# Altium PCB NEW_PCB_2021-05-29.pcbdoc
Units mm, origin at the board's own origin, x right, y up, seen from the top; angles counter-clockwise.
Board outline 221.55 x 181.63 mm, 2 copper layers (Top Layer, Bottom Layer); 16 components, 10 nets, 32 pads, 0 vias.
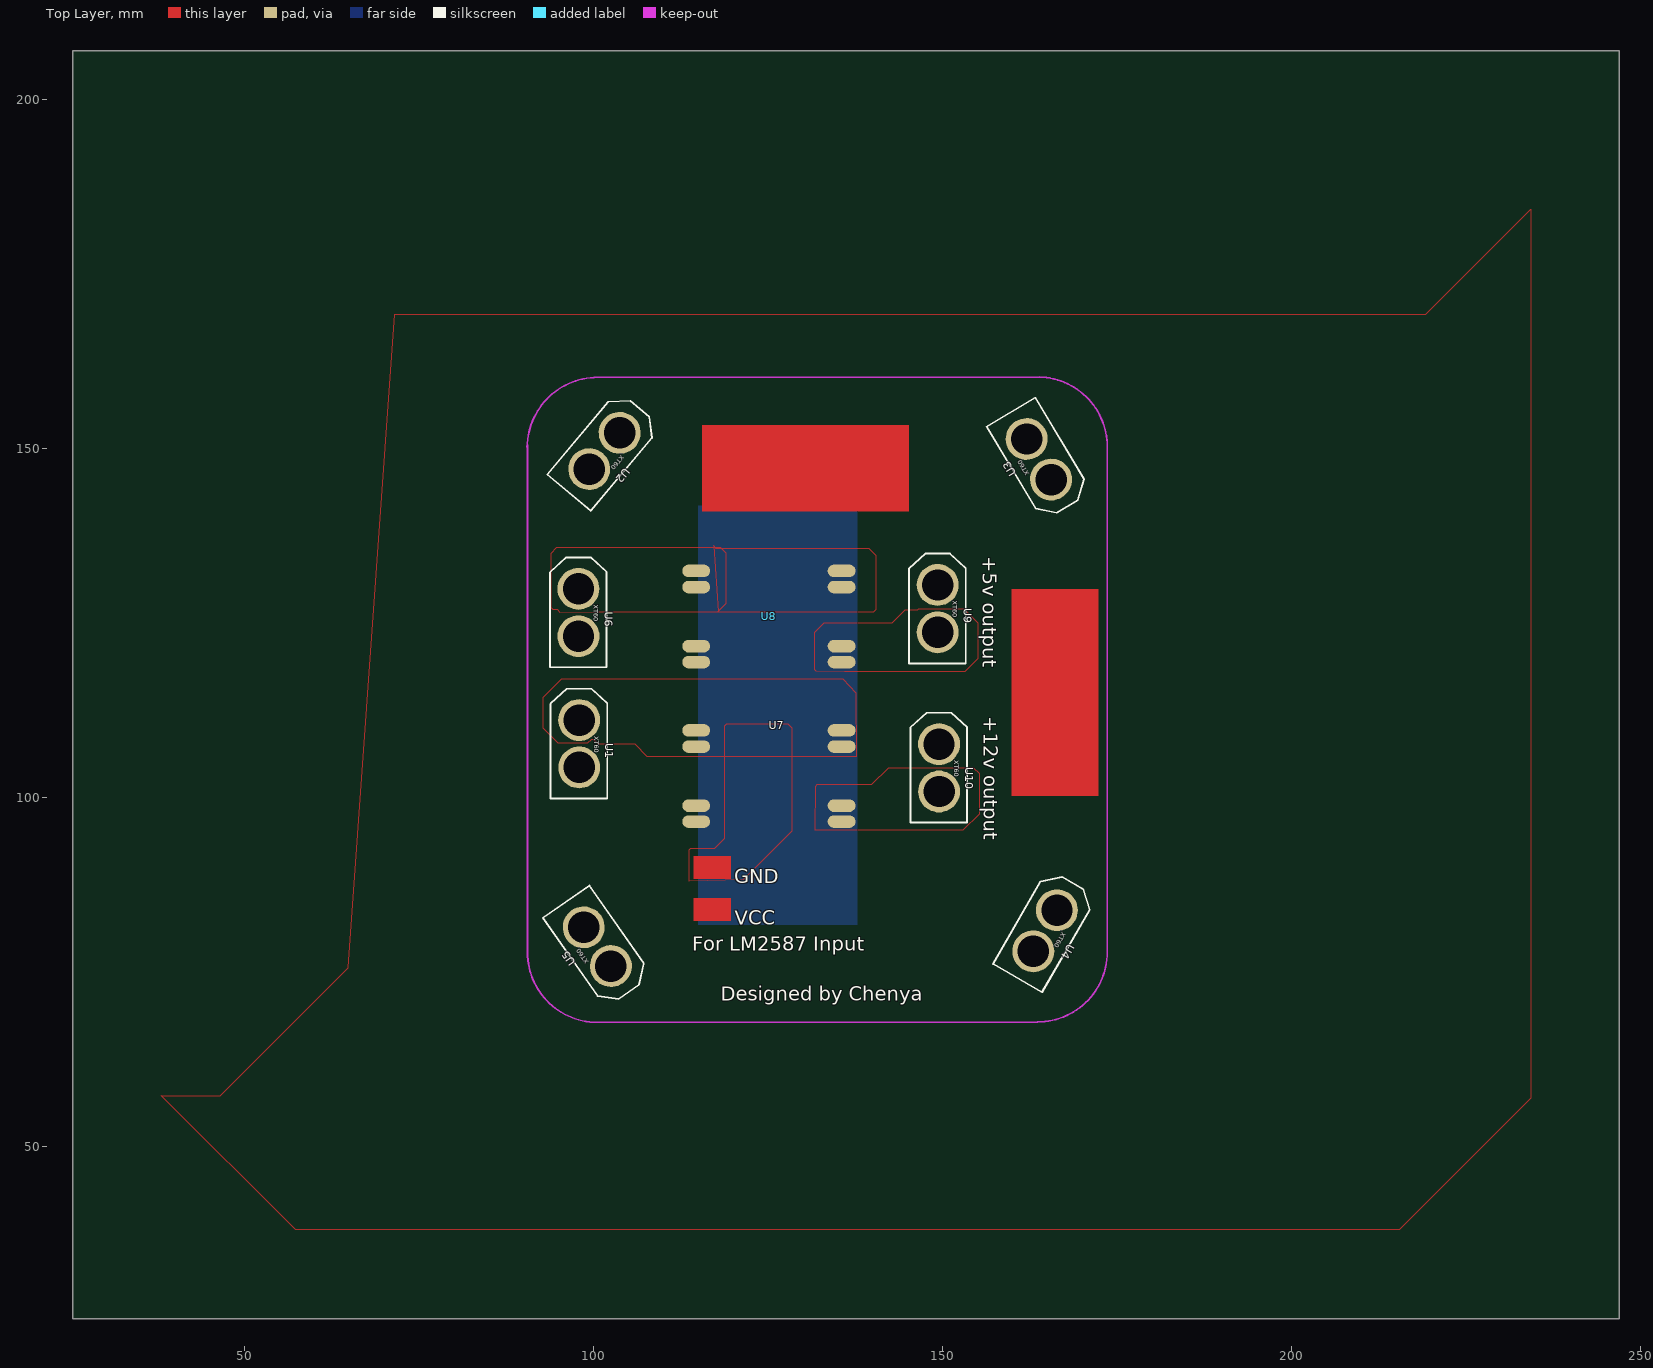
[diagram p0: Top Layer view]
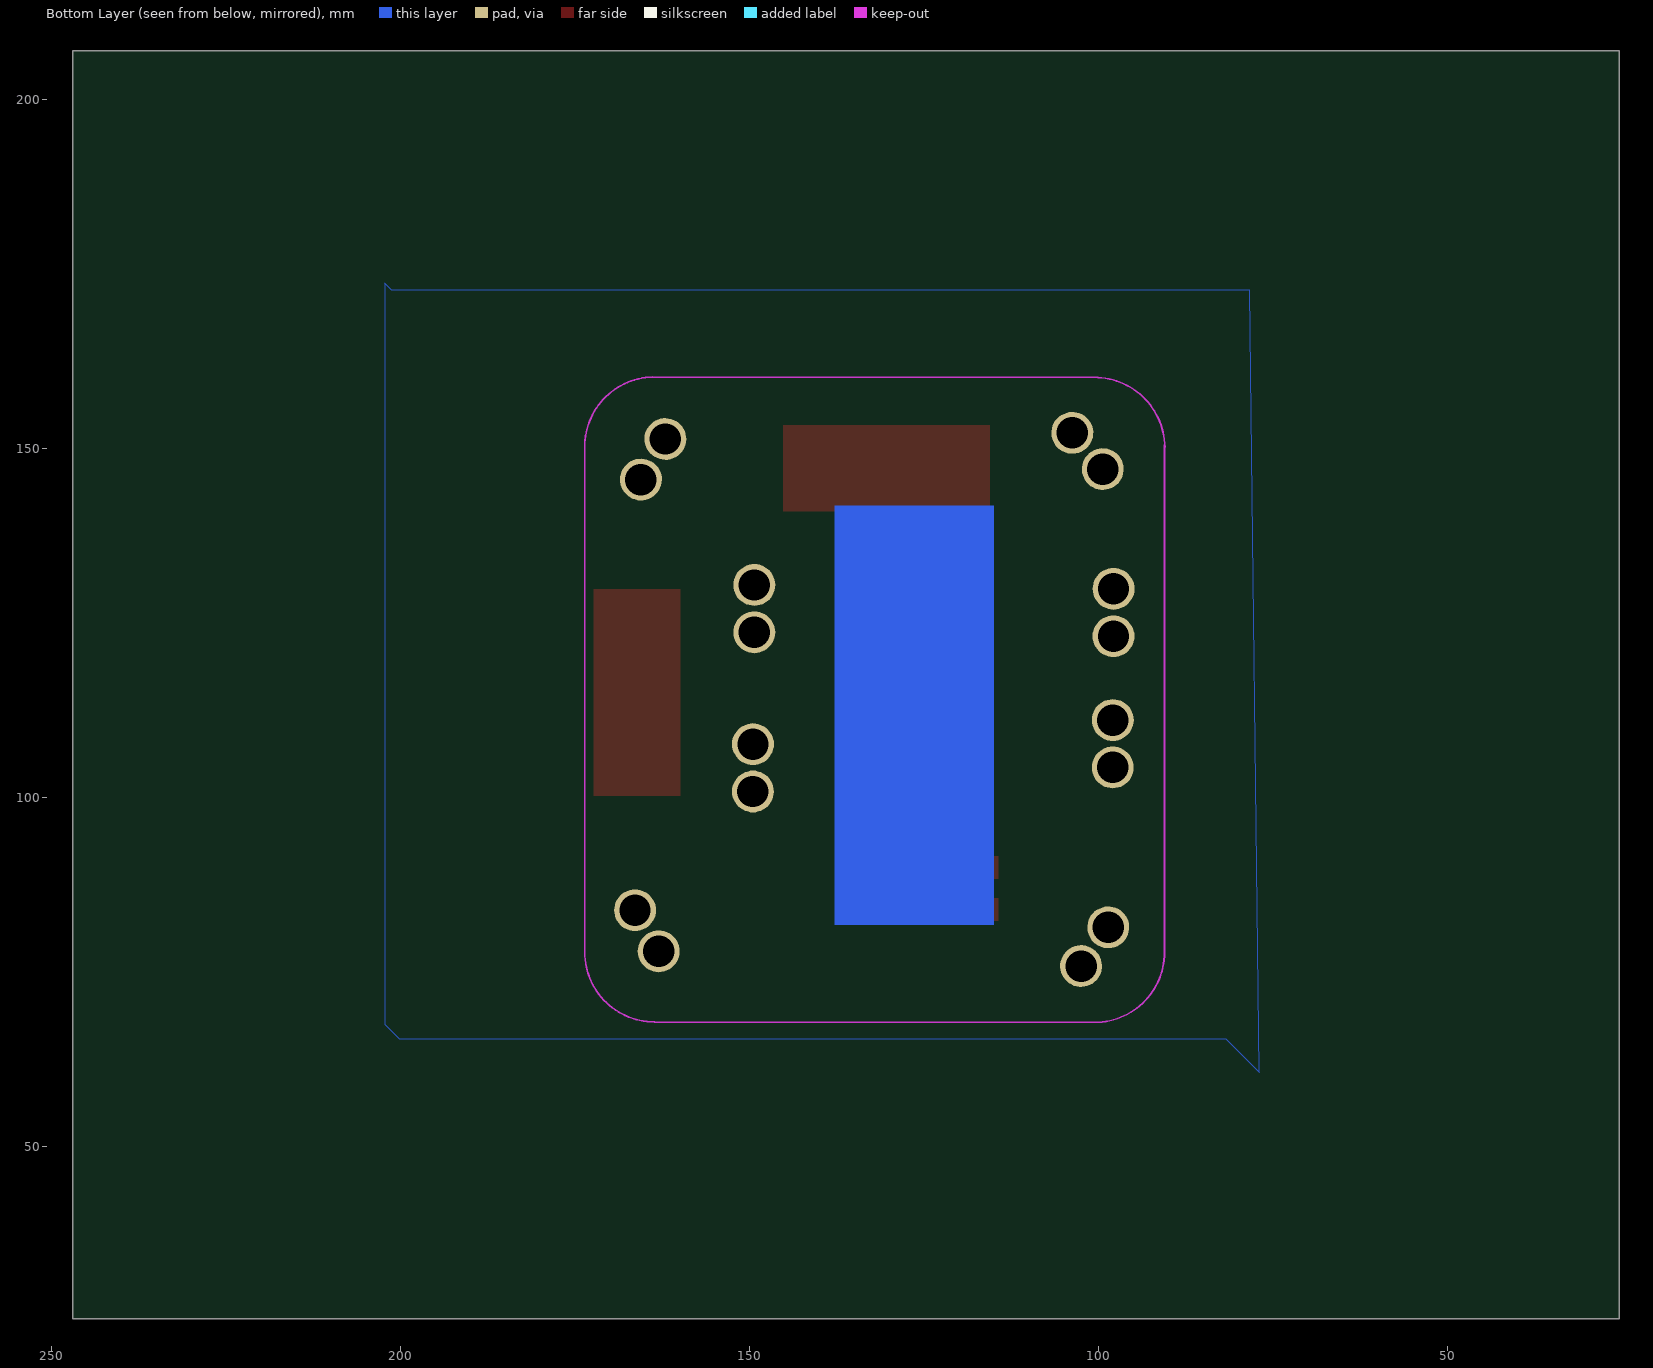
[diagram p1: Bottom Layer view, seen from below]

## Layer stack, top to bottom
Top Layer: signal copper (thickness not stored)
Dielectric: dielectric 0.32, FR-4, Dk 4.8
Bottom Layer: signal copper (thickness not stored)

## Board outline
246.95,25.4 25.4,25.4 25.4,207.033 246.95,207.033

## Components (designator, comment, footprint, x,y, rotation, side; value= is the part's Value field where it differs from the comment)
U1 "XT60 BY BUCK" "XT60 BY BUCK" 97.95,111.15 r270 top
U2 "XT60 BY BUCK" "XT60 BY BUCK" 103.75,152.3 r230 top
U3 "XT60 BY BUCK" "XT60 BY BUCK" 165.55,145.6 r121 top
U4 "XT60 BY BUCK" "XT60 BY BUCK" 166.4,83.9 r240 top
U5 "XT60 BY BUCK" "XT60 BY BUCK" 102.5,75.9 r125 top
U6 "XT60 BY BUCK" "XT60 BY BUCK" 97.85,129.95 r270 top
U7 "DC-DC_4P引脚" DC-DC_4P引脚 126.15,103.2 r0 top
U8 "DC-DC_4P引脚" DC-DC_4P引脚 126.15,126.05 r0 top
U9 "XT60 BY BUCK" "XT60 BY BUCK" 149.3,130.499 r270 top
U10 "XT60 BY BUCK" "XT60 BY BUCK" 149.5,107.699 r270 top
? "" ? 146.993,110.332 r0 top
? "" ? 158.506,131.126 r0 top
? "" ? 151.243,96.71 r0 top
? "" ? 121.937,173.982 r0 top
? "" ? 125.143,88.255 r0 top
? "" ? 159.223,130.99 r0 top

## Footprints (in the part's own frame and the unit in brackets; to place one, negate y for a bottom-side part, rotate by r counter-clockwise, add the part's x,y. Pads: shape width x height; smd on the part's side, far side on the other; paste and mask are expansions set on the pad)
DC-DC_4P引脚 [mm]
  oval 4x1.8 smd: 1(-11.43,6.477) 2(-11.43,4.15) 3(-11.43,-4.318) 4(-11.43,-6.604) 5(9.398,-6.604) 6(9.398,-4.318) 7(9.398,4.15) 8(9.398,6.477)
"XT60 BY BUCK" [mm]
  round 6 hole 4.5: 1(6.787,0.005) 2(0,0)
  silkscreen extent -4.5,-4.1 11.24,4.02
? [mm]

## Nets (pads, with @x,y where several pads share a name; then routed paths per layer and width w, separated by ;. In a path a pad name is that pad's centre, name@x,y a point inside that pad or via, vN(x,y) a via of type N, cw(c..) or ccw(c..) an arc to the next point about the centre after c; other vN are vias at no path point)
+5V: U8.5 U8.6 U9.1
+12V: U7.5 U7.6 U10.1
GND: U1.2 U2.2 U3.2 U4.2 U5.2 U6.2 U7.1 U7.2 U7.7 U7.8 U8.1 U8.2 U8.7 U8.8 U9.2 U10.2
S$24: 
S$325: 
S$327: 
S$331: 
S$334: 
S$338: 
VCC: U1.1 U2.1 U3.1 U4.1 U5.1 U6.1 U7.3 U7.4 U8.3 U8.4

## Polygon pours and split planes (outlines as drawn)
GND on Top Layer (solid): 100.3,126.7 117.8,126.7 119,127.9 119,135.05 118.25,135.8 94.7,135.8 93.9,135 93.9,127.3 94.2,127 94.8,127 95.2,126.6
GND on Top Layer (solid): 117.9,126.7 140.15,126.7 140.5,127.05 140.5,134.7 139.5,135.7 117.6,135.7 117.2,136.1
GND on Top Layer (solid): 92.8,109.95 92.8,114.4 95.45,117.05 135.7,117.05 137.55,115.05 137.65,105.9 107.7,105.9 105.95,107.65 100.75,107.65 100.05,108.35 99.65,108.35 99.1,107.8 94.95,107.8 92.8,109.95
+5V on Top Layer (solid): 136,118.15 153.25,118.15 155.1,120 155.1,125 153.1,127 146.5,127 146.35,126.85 144.6,126.85 142.75,125 133,125 131.65,123.65 131.65,118.4 131.85,118.2
+12V on Top Layer (solid): 131.7,95.4 153,95.4 155.3,97.7 155.3,103.45 154.5,104.25 142.2,104.25 139.8,101.85 132,101.85 131.75,101.6
GND on Top Layer (solid): 113.7,88.05 113.7,92.55 113.95,92.8 117.4,92.8 118.8,94.2 118.8,110.35 119.1,110.65 127.8,110.65 128.4,110.05 128.4,95.25 121.45,88.3
VCC on Top Layer (solid): 71.5,169.3 219.2,169.3 234.25,184.35 234.25,56.95 215.4,38.1 57.35,38.1 38.1,57.35 46.55,57.35 64.9,75.7
GND on Bottom Layer (solid): 78.3,172.7 201.25,172.7 202.25,173.7 202.25,67.55 200.2,65.5 81.8,65.5 77,60.7

## Keep-outs
Keep-Out Layer:
  lines w0.254: 163.85,160.3 cw(c163.603,150.303) 173.603,150.303
  lines w0.254 net S$327: 163.599,67.9 ccw(c163.6,77.9) 173.6,77.9
  lines w0.254 net S$331: 90.492,150.257 cw(c100.65,150.1) 100.605,160.259
  lines w0.254 net S$334: 90.55,77.85 ccw(c100.55,77.85) 100.55,67.85

## Other copper
Top Layer:
  rectangle net GND: 114.3,88.4 119.7,91.7
  rectangle net VCC: 114.3,82.35 119.7,85.65
  rectangle net VCC: 115.55,141 145.2,153.45
  rectangle net VCC: 159.9,100.25 172.35,129.9
Bottom Layer:
  rectangle net GND: 115,81.8 137.85,141.85

## Silkscreen, mask and mechanical layers (free items; w line width, h text height)
Top Overlay:
  text "+5v output" at 155.734,134.6 h2.03 r270
  text "+12v output" at 155.934,111.7 h2.03 r270
  text "GND" at 120.2,87.784 h2.03
  text "VCC" at 120.25,81.834 h2.03
  text "For LM2587 Input" at 114.15,78.084 h2.03
  text "Designed by Chenya" at 118.25,70.934 h2.03
Top Solder:
  rectangle net GND: 114.249,88.349 119.751,91.751
  rectangle net VCC: 114.249,82.299 119.751,85.701
  rectangle net VCC: 115.499,140.949 145.251,153.501
  rectangle net VCC: 159.849,100.199 172.401,129.951
Bottom Solder:
  rectangle net GND: 114.949,81.749 137.901,141.901

## Text inside footprints (layer, text, board x,y; h text height)
U1: Top Overlay "XT60" at 100.139,108.864 h0.7 r270
U2: Top Overlay "XT60" at 103.958,149.141 h0.7 r230
U3: Top Overlay "XT60" at 162.496,146.431 h0.7 r121
U4: Top Overlay "XT60" at 167.153,80.825 h0.7 r240
U5: Top Overlay "XT60" at 99.395,76.517 h0.7 r125
U6: Top Overlay "XT60" at 100.039,127.664 h0.7 r270
U9: Top Overlay "XT60" at 151.49,128.213 h0.7 r270
U10: Top Overlay "XT60" at 151.689,105.414 h0.7 r270